# EAGLE board pcb (EAGLE 9.6.2)
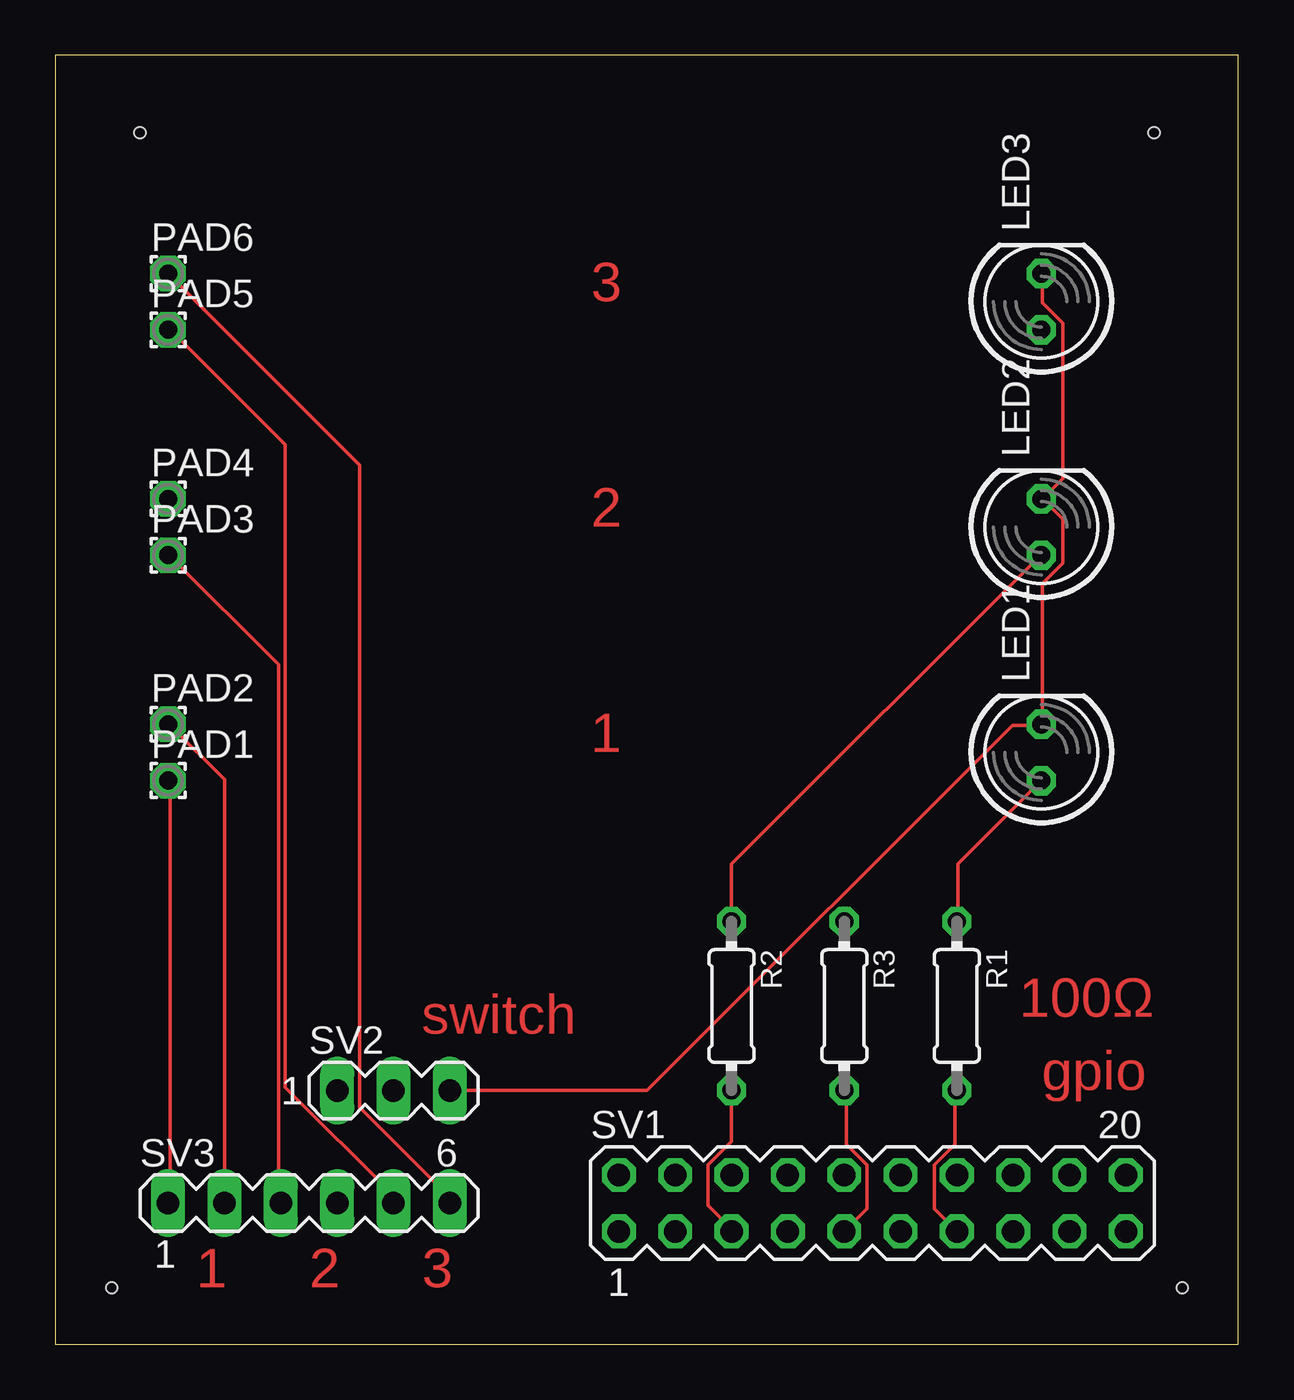
[diagram p0: board, top side]
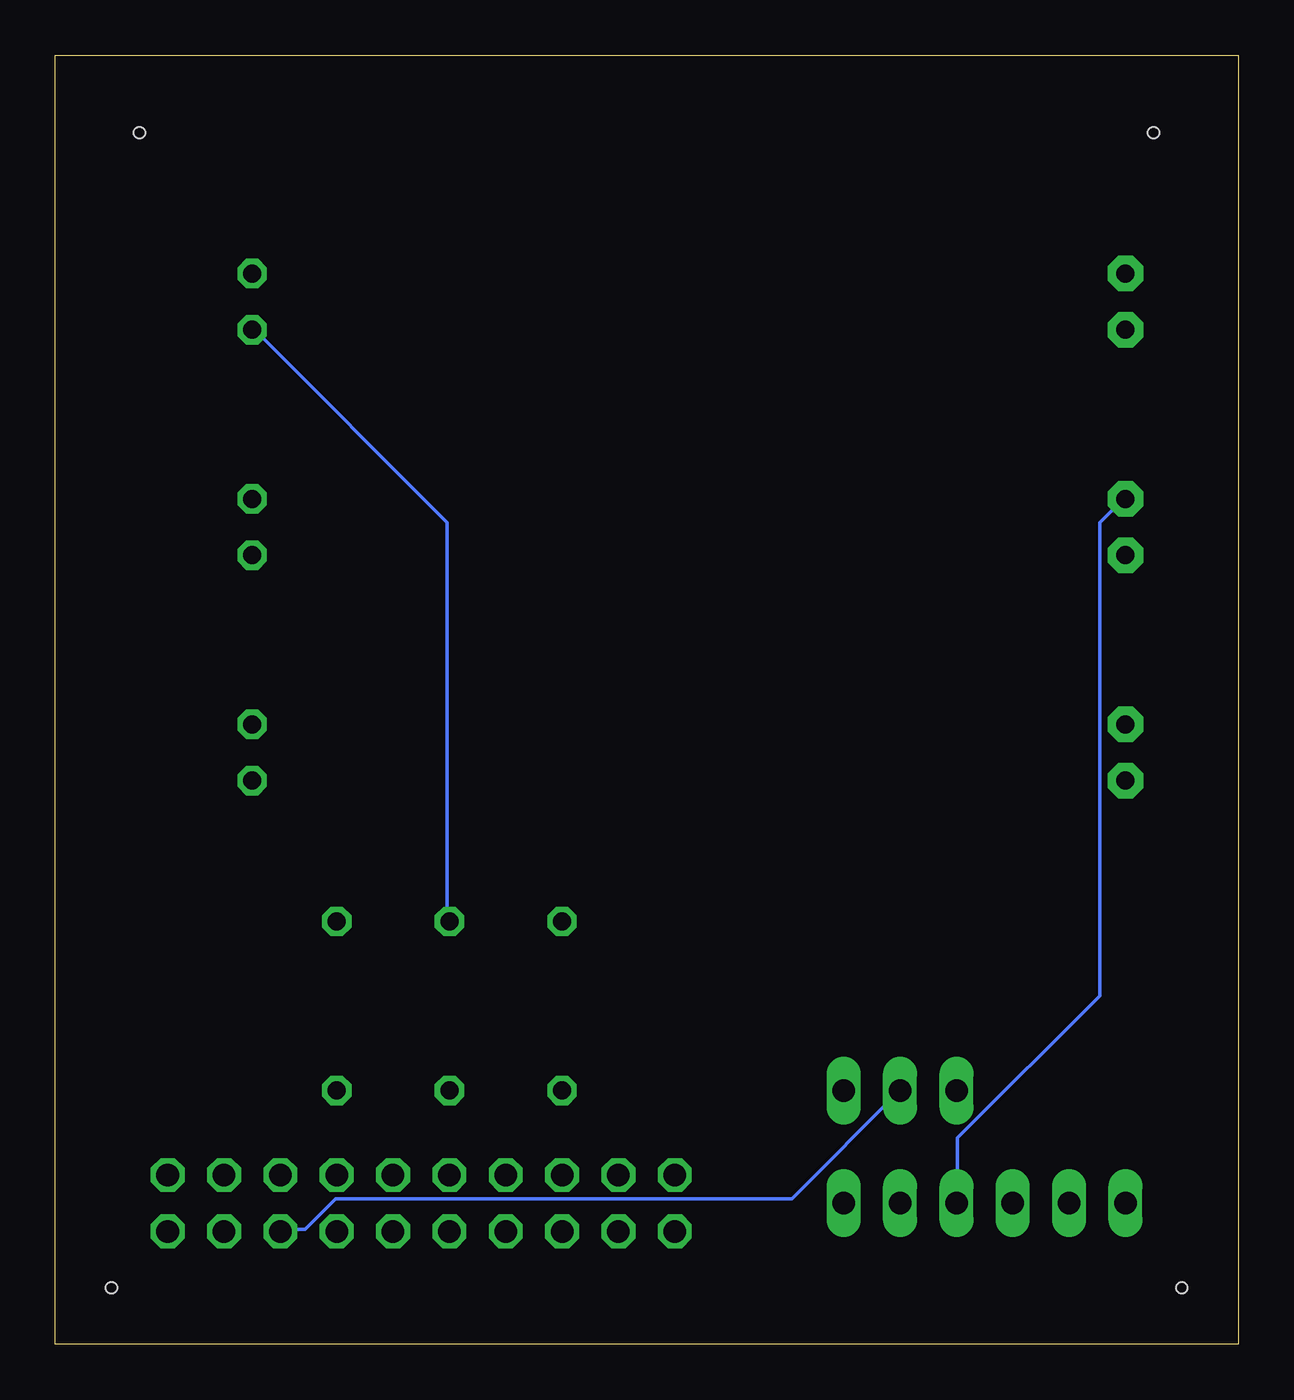
[diagram p1: board, bottom side, seen from below]

Size 53.32 x 58.09 mm. Coordinates in mm from the lower left corner, seen from the top.
Outline: 0,0 53.32,0 53.32,58.09 0,58.09 0,0
Copper layers (1*16): Top 0.035mm / dielectric 1.5mm / Bottom 0.035mm
Design rules "default": minimum track width 6mil, minimum drill 0.35mm, track to track 6mil, track to pad 6mil, pad to pad 6mil, via to via 6mil, smd to smd 6mil, copper to edge 40mil, drill to drill 6mil, minimum pad ring 10mil, minimum via ring 8mil, stop-mask expansion 4mil, vias tented up to drill 0mil, thermal gap 10mil
Holes 0.5 mm at 3.81,54.61 49.53,54.61 50.8,2.54 2.54,2.54

## Footprints (pad centres in the part's own frame; a part is rotated, then mirrored left to right if it is on the bottom)
LED5MM = drill 0.813 octagon: A -1.27,0; K 1.27,0
1,6/0,8 = drill 0.813 pad 1.6 octagon: 1 0,0
0204/7 = drill 0.813 octagon: 1 -3.81,0; 2 3.81,0
MA10-2 = drill 1.016 octagon: 1 -11.43,-1.27; 2 -11.43,1.27; 3 -8.89,-1.27; 4 -8.89,1.27; 5 -6.35,-1.27; 6 -6.35,1.27; 7 -3.81,-1.27; 8 -3.81,1.27; 9 -1.27,-1.27; 10 -1.27,1.27; 11 1.27,-1.27; 12 1.27,1.27; 13 3.81,-1.27; 14 3.81,1.27; 15 6.35,-1.27; 16 6.35,1.27; 17 8.89,-1.27; 18 8.89,1.27; 19 11.43,-1.27; 20 11.43,1.27
MA03-1 = drill 1.016 long: 1 -2.54,0; 2 0,0; 3 2.54,0
MA06-1 = drill 1.016 long: 1 -6.35,0; 2 -3.81,0; 3 -1.27,0; 4 1.27,0; 5 3.81,0; 6 6.35,0

## Placement (x,y rotation side)
LED1  [LED5MM]  44.45,26.67 90 top
LED2  [LED5MM]  44.45,36.83 90 top
LED3  [LED5MM]  44.45,46.99 90 top
PAD1  [1,6/0,8]  5.08,25.4 0 top
PAD2  [1,6/0,8]  5.08,27.94 0 top
PAD3  [1,6/0,8]  5.08,35.56 0 top
PAD4  [1,6/0,8]  5.08,38.1 0 top
PAD5  [1,6/0,8]  5.08,45.72 0 top
PAD6  [1,6/0,8]  5.08,48.26 0 top
R1  [0204/7]  40.64,15.24 270 top
R2  [0204/7]  30.48,15.24 270 top
R3  [0204/7]  35.56,15.24 270 top
SV1  [MA10-2]  36.83,6.35 0 top
SV2  [MA03-1]  15.24,11.43 0 top
SV3  [MA06-1]  11.43,6.35 0 top

## Library data of the parts
LED1-LED3 = led
PAD1-PAD6 = wirepad
R1-R3 = rcl; SPICEPREFIX: R
SV1-SV3 = con-lstb; OC_FARNELL: unknown; OC_NEWARK: unknown

## Nets
GROUND: LED1.K LED2.K LED3.K SV2.3
N$1: PAD6.1 SV3.6
N$2: R2.2 SV1.5
N$3: LED3.A R3.1
N$4: LED2.A R2.1
N$5: LED1.A R1.1
N$6: R1.2 SV1.13
N$7: R3.2 SV1.9
N$8: SV1.15 SV2.2
N$9: PAD5.1 SV3.5
N$10: PAD4.1 SV3.4
N$11: PAD3.1 SV3.3
N$12: PAD2.1 SV3.2
N$13: PAD1.1 SV3.1

## Tracks (layer width: path | path; a pad name or v marks a point on that pad's centre or on a via)
GROUND
  Top 0.152: 44.5,38.1 45.41,37.19 45.41,35.2 44.5,34.29 44.5,28.04 LED1.K 44.35,27.89 43.13,27.89 26.67,11.43 SV2.3 | 44.5,38.1 45.41,39.01 45.41,46.02 44.5,46.94 44.5,48.16 LED3.K | 44.5,38.1 LED2.K
N$1
  Top 0.152: PAD6.1 13.72,39.62 13.72,10.67 17.68,6.71 17.68,6.4 SV3.6
N$2
  Top 0.152: R2.2 30.48,9.14 29.41,8.08 29.41,6.25 30.48,5.18 SV1.5
N$3
  Bottom 0.152: R3.1 35.66,19.05 35.66,37.03 44.35,45.72 LED3.A
N$4
  Top 0.152: R2.1 30.48,21.64 44.35,35.51 LED2.A
N$5
  Top 0.152: LED1.A 40.69,21.64 40.69,19.05 R1.1
N$6
  Top 0.152: SV1.13 39.62,6.1 39.62,8.08 40.54,8.99 40.54,11.43 R1.2
N$7
  Top 0.152: SV1.9 36.58,6.1 36.58,8.08 35.66,8.99 35.66,11.43 R3.2
N$8
  Bottom 0.152: SV2.2 20.12,6.55 40.69,6.55 42.06,5.18 43.13,5.18 SV1.15
N$9
  Top 0.152: SV3.5 15.24,6.71 10.36,11.58 10.36,40.54 5.18,45.72 PAD5.1
N$10
  Bottom 0.152: SV3.4 12.65,6.4 12.65,9.3 6.25,15.7 6.25,37.03 5.18,38.1 PAD4.1
N$11
  Top 0.152: SV3.3 10.06,6.4 10.06,30.63 5.18,35.51 PAD3.1
N$12
  Top 0.152: SV3.2 7.62,25.45 5.18,27.89 PAD2.1
N$13
  Top 0.152: SV3.1 5.18,6.4 5.18,25.3 PAD1.1

## Text on the board
Top: 3 | 2 | 1 | 100Ω | switch | gpio | 1 | 2 | 3